# EAGLE board Controller (EAGLE 9.2.0)
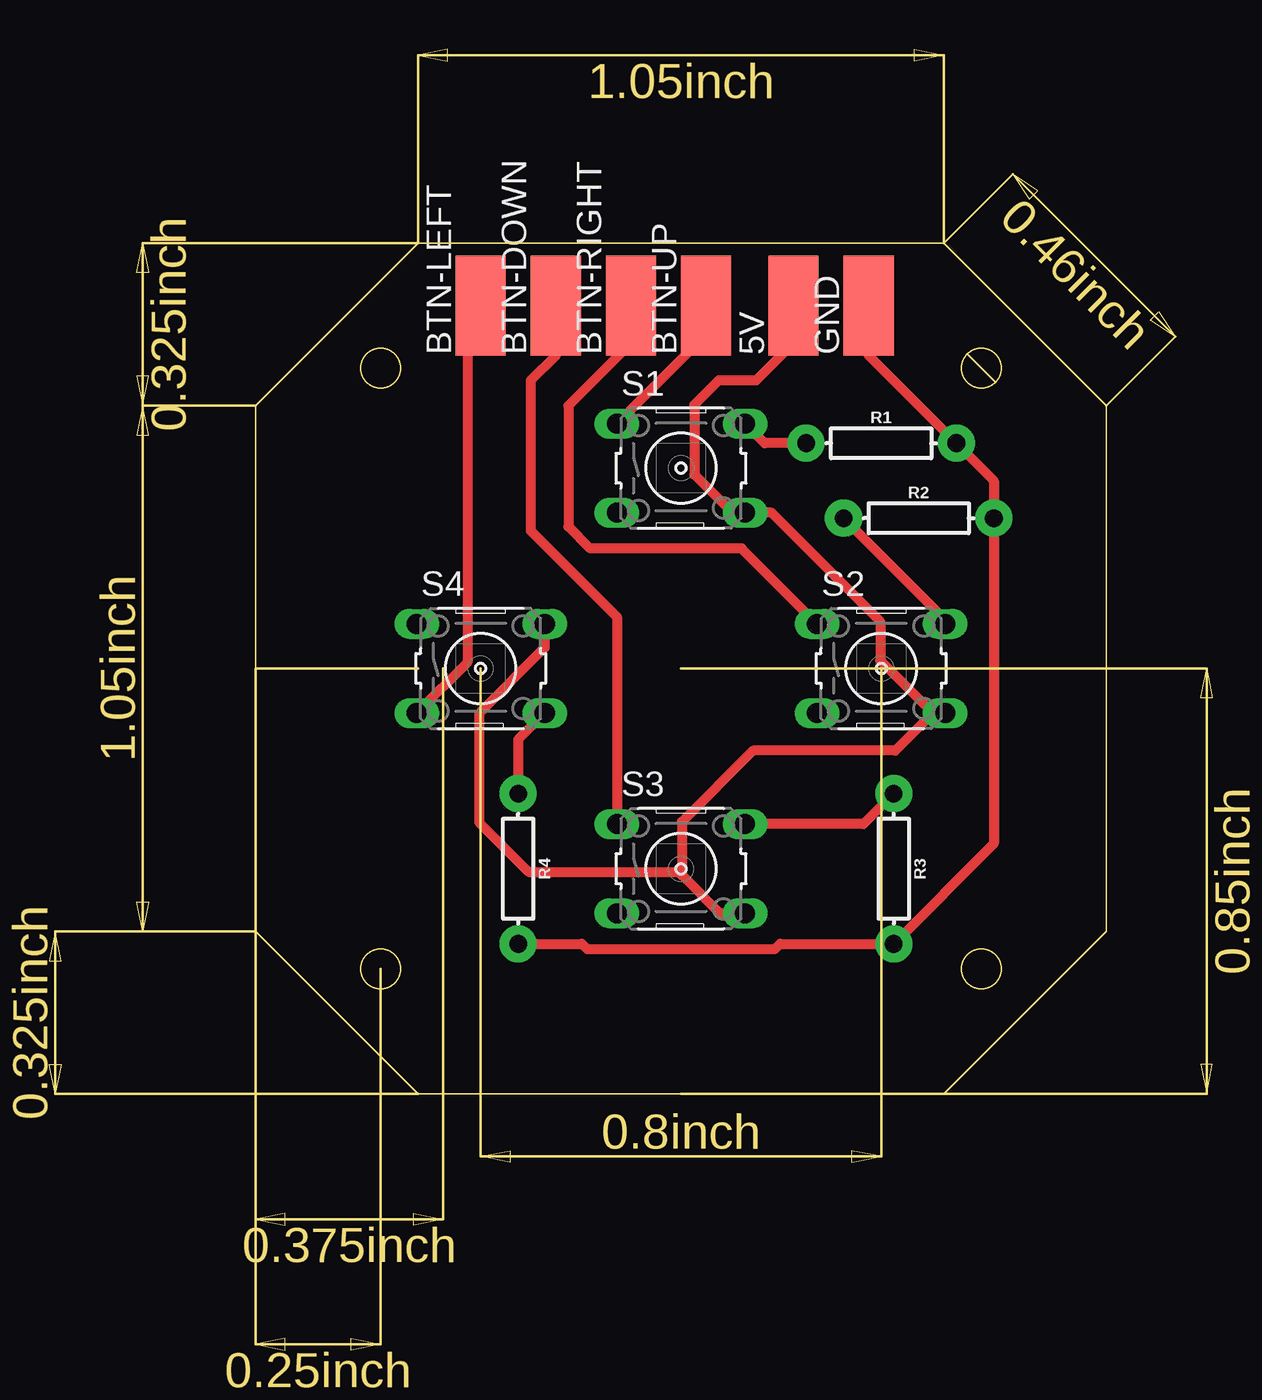
[diagram p0: board, top side]

Size 43.18 x 43.18 mm. Coordinates in mm from the lower left corner, seen from the top.
Outline: 8.26,0 34.92,0 43.18,8.26 43.18,34.92 34.92,43.18 8.26,43.18 0,34.92 0,8.26 8.26,0
Outline: circle at 36.83,36.83 radius 1
Outline: circle at 6.35,36.83 radius 1
Outline: circle at 6.35,6.35 radius 1
Outline: circle at 36.83,6.35 radius 1
Copper layers (1*16): Top 0.035mm / dielectric 1.5mm / Bottom 0.035mm
Design rules "OthermillDRC_1_32_v2": minimum track width 8mil, minimum drill 0.8mm, track to track 0.794003125mm, track to pad 0.794003125mm, pad to pad 0.794003125mm, via to via 0.794003125mm, smd to smd 0mil, copper to edge 0mil, drill to drill 1mil, minimum pad ring 10mil, minimum via ring 10mil, stop-mask expansion 1mil, vias tented up to drill 30mil, thermal gap 10mil

## Footprints (pad centres in the part's own frame; a part is rotated, then mirrored left to right if it is on the bottom)
SMD2,54-5,08 = smd 2.54 x 5.08: 1 0,0
AXIAL-0.3 = drill 0.9 pad 1.88: P$1 -3.81,0; P$2 3.81,0
B3F-10XX = drill 1.016 long: 1 -3.251,2.261; 2 3.251,2.261; 3 -3.251,-2.261; 4 3.251,-2.261

## Placement (x,y rotation side)
5V  [SMD2,54-5,08]  27.3,40.01 0 top
BTN-DOWN  [SMD2,54-5,08]  15.24,40.01 0 top
BTN-LEFT  [SMD2,54-5,08]  11.43,40.01 0 top
BTN-RIGHT  [SMD2,54-5,08]  19.05,40.01 0 top
BTN-UP  [SMD2,54-5,08]  22.86,40.01 0 top
GND  [SMD2,54-5,08]  31.11,40.01 0 top
R1  [AXIAL-0.3]  31.75,33.02 0 top
R2  [AXIAL-0.3]  33.66,29.21 0 top
R3  [AXIAL-0.3]  32.38,11.43 270 top
R4  [AXIAL-0.3]  13.34,11.43 270 top
S1  [B3F-10XX]  21.59,31.75 0 top
S2  [B3F-10XX]  31.75,21.59 0 top
S3  [B3F-10XX]  21.59,11.43 0 top
S4  [B3F-10XX]  11.43,21.59 0 top

## Library data of the parts
5V BTN-DOWN BTN-LEFT BTN-RIGHT BTN-UP GND R1-R4 = ENGR294
S1-S4 = switch-omron; MPN: B3F-1000; OC_FARNELL: 176432; OC_NEWARK: 36M3542

## Nets
N$1: BTN-DOWN.1 S3.1
N$2: BTN-RIGHT.1 S2.1
N$3: BTN-UP.1 S1.1
N$4: BTN-LEFT.1 S4.3
N$5: GND.1 R1.P$2 R2.P$2 R3.P$2 R4.P$2
N$6: R1.P$1 S1.2
N$7: R2.P$1 S2.2
N$8: R3.P$1 S3.2
N$10: R4.P$1 S4.4
N$11: 5V.1 S1.4 S2.4 S3.4 S4.2

## Tracks (layer width: path | path; a pad name or v marks a point on that pad's centre or on a via)
N$1
  Top 0.508: BTN-DOWN.1 15.24,37.47 13.97,36.2 13.97,28.57 18.34,24.21 S3.1
N$2
  Top 0.203: BTN-RIGHT.1 19.05,38.1
  Top 0.508: S2.1 24.67,27.68 16.98,27.68 15.88,28.78 15.88,34.92 19.05,38.1
N$3
  Top 0.508: BTN-UP.1 22.86,38.53 S1.1
N$4
  Top 0.508: BTN-LEFT.1 10.75,39.33 10.75,21.9 S4.3
N$5
  Top 0.203: GND.1 31.11,37.47
  Top 0.508: 31.11,37.47 R1.P$2 37.47,31.11 R2.P$2 37.47,12.7 R3.P$2 26.61,7.62 26.35,7.36 16.83,7.36 16.57,7.62 R4.P$2
N$6
  Top 0.508: R1.P$1 25.83,33.02 S1.2
N$7
  Top 0.508: R2.P$1 35,24.05 S2.2
N$8
  Top 0.508: R3.P$1 30.84,13.69 S3.2
N$10
  Top 0.508: R4.P$1 13.34,17.98 S4.4
N$11
  Top 0.508: S2.4 34.37,19.33 | 34.37,19.33 32.46,17.42 25.25,17.42 21.63,13.8 21.63,11.11 | 5V.1 27.3,38.1 25.4,36.2 23.5,36.2 22.27,34.97 22.27,31.43 24.21,29.49 S1.4 26.18,29.49 31.71,23.96 31.71,21.99 34.37,19.33 | S3.4 23.57,9.17 21.63,11.11 | S4.2 14.68,22.65 11.35,19.32 11.35,13.78 13.88,11.25 21.5,11.25 21.63,11.11